# Altium PCB Room04.PcbDoc
Units mil, origin at the board's own origin, x right, y up, seen from the top; angles counter-clockwise.
Board outline 4330.71 x 6653.54 mil, 2 copper layers (Top Layer, Bottom Layer); 102 components, 95 nets, 435 pads, 114 vias.
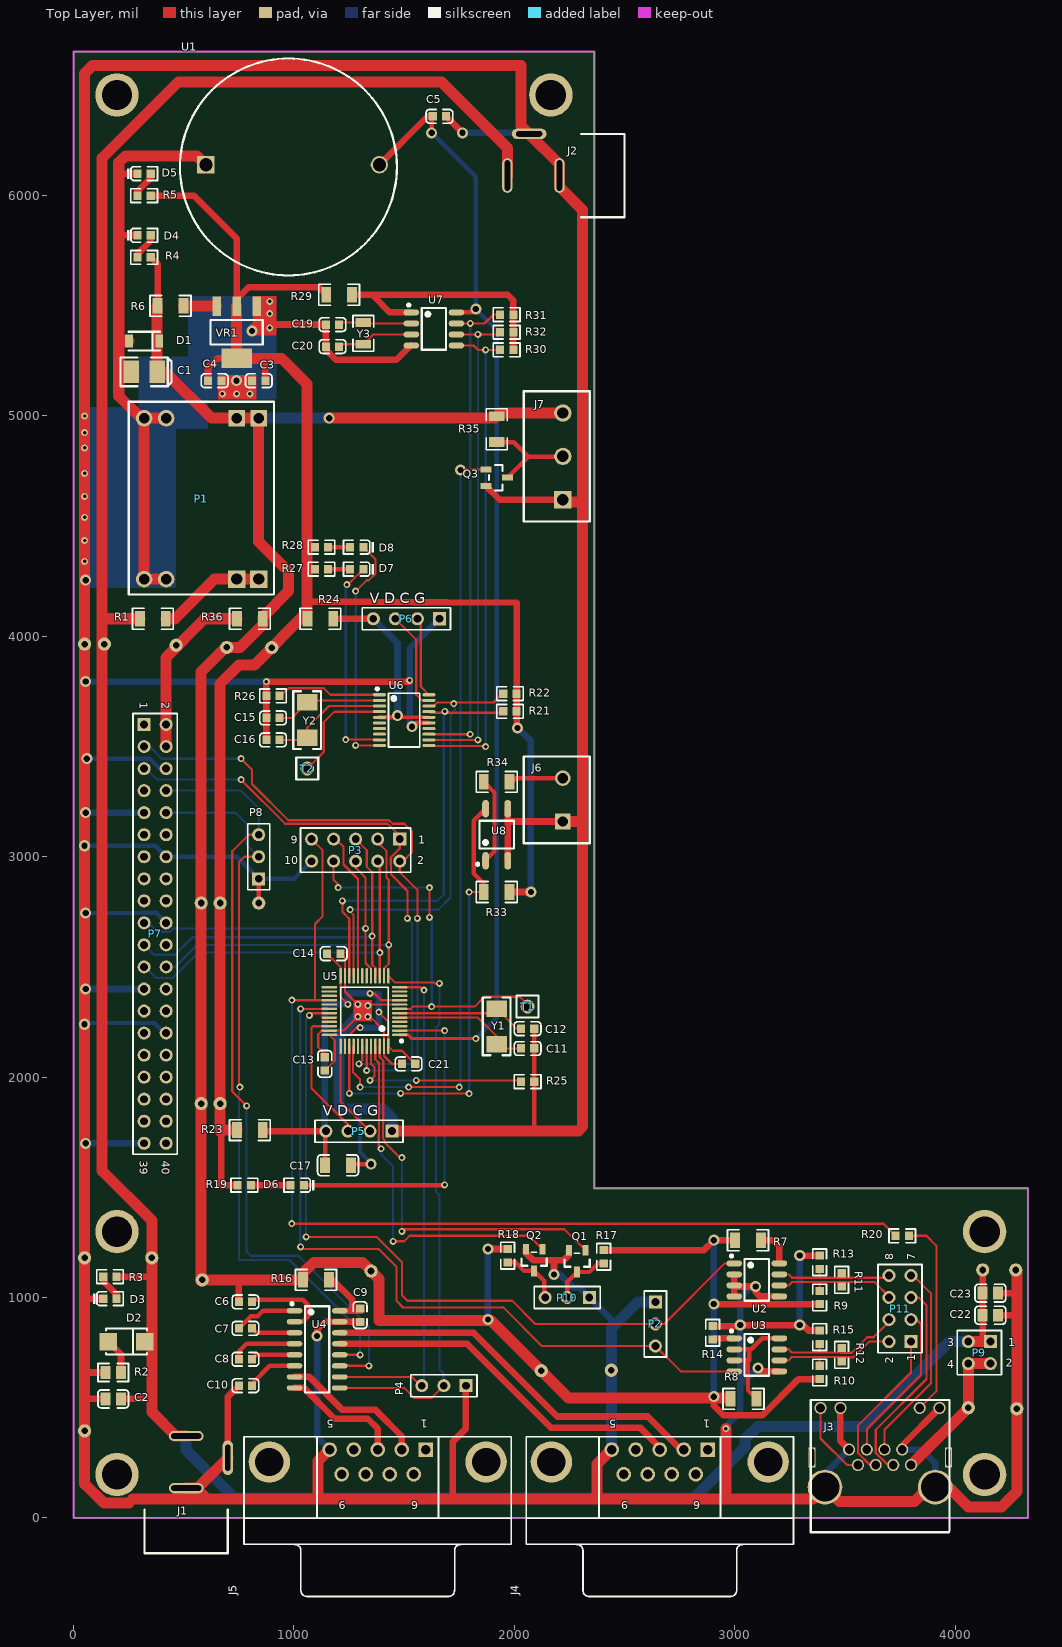
[diagram p0: Top Layer view]
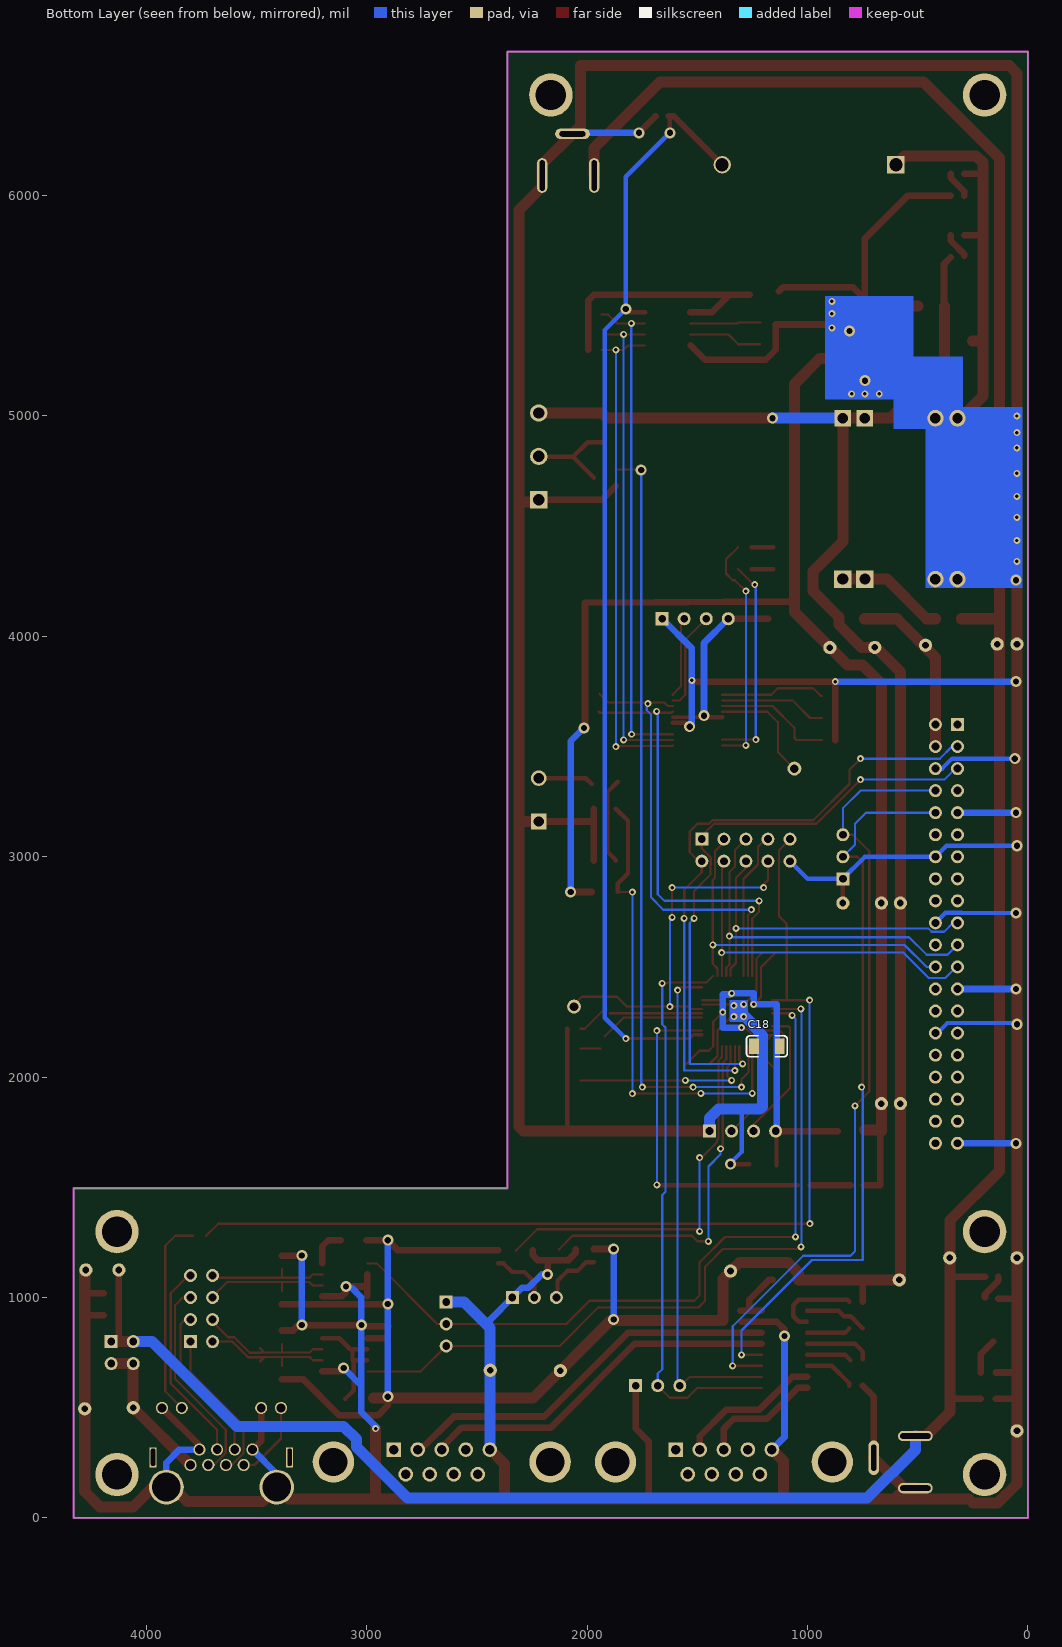
[diagram p1: Bottom Layer view, seen from below]
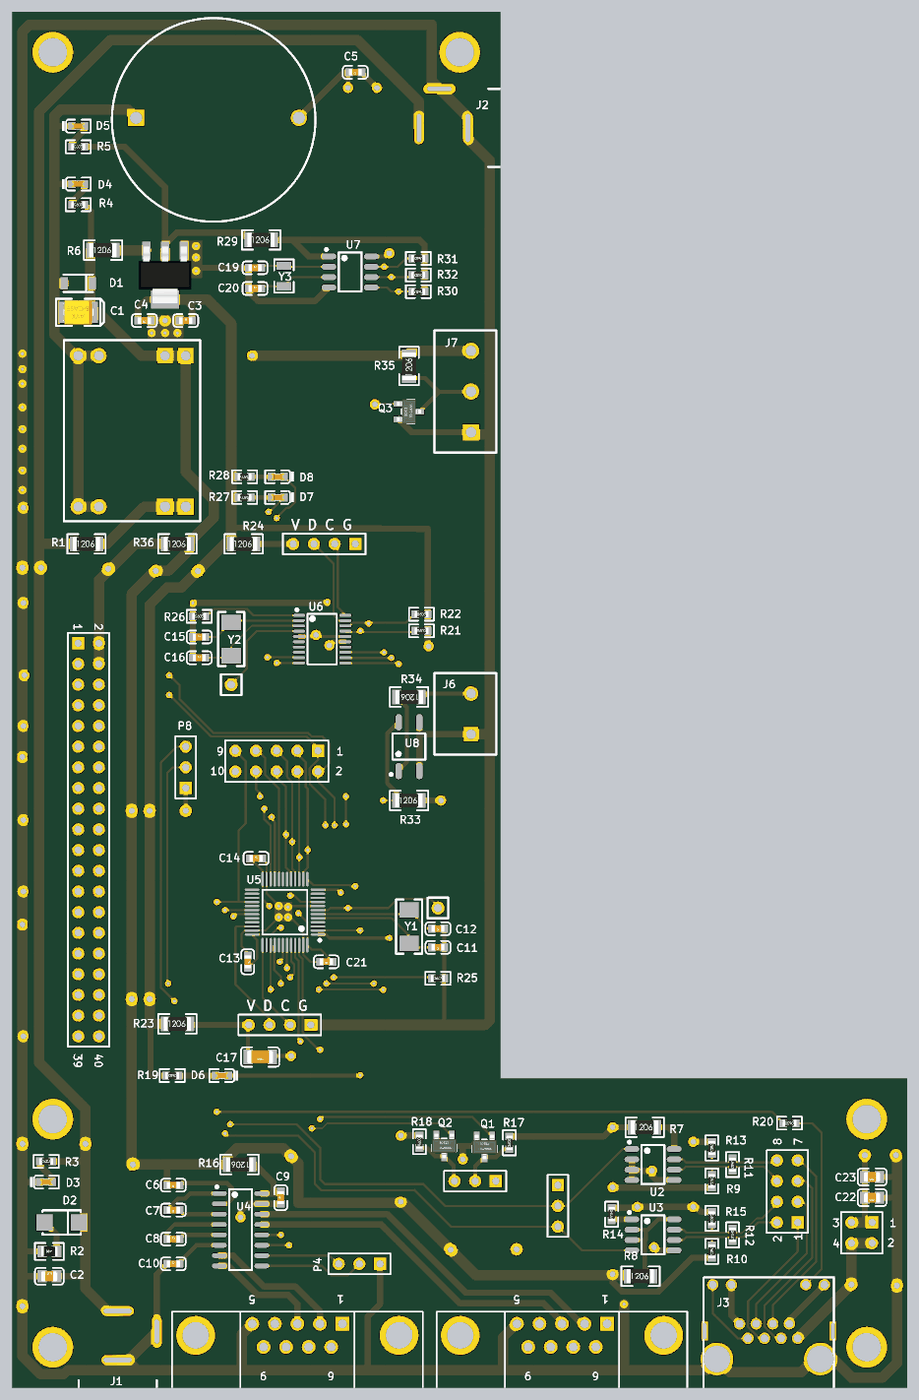
[diagram p2: 3D render of the assembled board from above, using the file's embedded part models]

## Layer stack, top to bottom
Top Layer: signal copper 1.4
Dielectric: dielectric 12.6, FR-4, Dk 4.8
Bottom Layer: signal copper 1.4

## Board outline
0,0 4330.71,0 4330.71,1496.06 2362.2,1496.06 2362.2,6653.54 0,6653.54

## Design rules (kind name [scope] priority, off if disabled: settings)
Clearance [All] p1: gap=6
DiffPairsRouting [All] p1: maxlimit=10 minlimit=10 mostfreqgap=10 maxuncoupledlength=500
Height [All] p1 off: minheight=0 maxheight=1000 prefheight=500
HoleSize [All] p1: absolutevalues=TRUE maxlimit=236.22 minlimit=1 maxpercent=80.000 minpercent=20.000
HoleToHoleClearance [All] p1: gap=6 allowstackedmicrovias=TRUE
MinimumSolderMaskSliver [All] p1: minsoldermaskwidth=4
PolygonConnect [All] p1: connectstyle=Relief reliefconductorwidth=10 reliefentries=4 polygonreliefangle="90 Angle"
RoutingVias [All] p1: holewidth=28 width=50 viastyle="Through Hole" minholewidth=11.81 minwidth=19.68 maxholewidth=28 maxwidth=50
SilkscreenOverComponentPads [All] p1 off: minsilkscreentomaskgap=10
SolderMaskExpansion [All] p1: expansion=4
Width Width_GND [InNet('GND')] p1: maxlimit=50 minlimit=10 preferedwidth=50
Width [All] p2: maxlimit=50 minlimit=10 preferedwidth=10
22 further rules are at their usual default settings.

## Classes and differential pairs
component class power: C1 C2 C3 C4 C5 C22 C23 D1 D2 D3 D4 D5 J1 J2 P1 R1 R2 R3 R4 R5 R6 U1 VR1
component class commu: C6 C7 C8 C9 C10 J3 J4 J5 P2 P9 P10 P11 Q1 Q2 R7 R8 R9 R10 R11 R12 R13 R14 R15 R16 R17 R18 U2 U3 U4
component class mcu: C11 C12 C13 C14 C15 C16 C17 C18 C21 D6 D7 D8 P3 P4 P5 P6 R19 R20 R21 R22 R23 R24 R25 R26 R27 R28 T1 T2 U5 U6 Y1 Y2
component class other: C19 C20 J6 J7 Q3 R29 R30 R31 R32 R33 R34 R35 U7 U8 Y3
component class raspi: P7 P8 R36
differential pair CON1: +CON1_P -CON1_N
differential pair CON2: +CON2_P -CON2_N

## Components (designator, comment, footprint, x,y, rotation, side; value= is the part's Value field where it differs from the comment)
C1 "100uF (107) ±10% 6.3V" CASE-B_3528 320,5200 r0 top
C2 "22uF (226) 20% 25V" 0805_C 180,540 r0 top
C3 "10uF (106) 10% 10V" 0603_C 840,5160 r0 top
C4 "100nF (104) 10% 50V" 0603_C 640,5160 r180 top
C5 "10uF (106) 10% 10V" 0603_C 1660,6360 r180 top
C6 "1uF (105) 10% 50V" 0603_C 780,980 r180 top
C7 "1uF (105) 10% 50V" 0603_C 780,860 r180 top
C8 "1uF (105) 10% 50V" 0603_C 780,720 r0 top
C9 "1uF (105) 10% 50V" 0603_C 1300,920 r90 top
C10 "1uF (105) 10% 50V" 0603_C 780,600 r0 top
C11 "20pF (200) 5% 50V" 0603_C 2060,2130 r180 top
C12 "20pF (200) 5% 50V" 0603_C 2060,2220 r180 top
C13 "100nF (104) 10% 50V" 0603_C 1140,2060 r270 top
C14 "10uF (106) 10% 10V" 0603_C 1180,2560 r0 top
C15 "20pF (200) 5% 50V" 0603_C 905,3630 r0 top
C16 "20pF (200) 5% 50V" 0603_C 905,3530 r0 top
C17 "100nF (104) 10% 50V" 1206_C 1200,1600 r180 top
C18 "100nF (104) 10% 50V" 1206_C 1185,2140 r180 bottom
C19 "12pF (120) 5% 50V" 0603_C 1175,5415 r0 top
C20 "12pF (120) 5% 50V" 0603_C 1175,5315 r0 top
C21 "10uF (106) 10% 10V" 0603_C 1520,2060 r180 top
C22 "22uF (226) 20% 25V" 0805_C 4160,920 r180 top
C23 "100nF(104) 10% 50V" 0805_C 4160,1020 r180 top
D1 "ZMM5V6" LL-34 320,5340 r180 top
D2 "SS54" SMA(DO-214AC)_S1 240,800 r180 top
D3 "绿灯 0603" 0603_LED_S1 165,995 r0 top
D4 "绿灯 0603" 0603_LED_S1 320,5820 r0 top
D5 "绿灯 0603" 0603_LED_S1 320,6100 r0 top
D6 "蓝灯 0603" 0603_LED_S1 1015,1510 r180 top
D7 "蓝灯 0603" 0603_LED_S1 1285,4305 r180 top
D8 "红灯 0603" 0603_LED_S1 1285,4405 r180 top
J1 "DC" DC005 700,-160 r90 top
J2 "DC" DC005 2500,6280 r180 top
J3 "RJ45" RJ45_1 3800,240 r0 top locked
J4 "D Connector 9" DSUB1.385-2H9 2660,-120 r180 top
J5 "D Connector 9" DSUB1.385-2H9 1380,-120 r180 top
J6 "KF301-2P" KF301-2P 2220,3160 r90 top
J7 "KF301-3P" KF301-3P 2220,4620 r90 top
P1 "DC-DC5V3A" DC-DC3A 320,4260 r90 top locked
P2 "Header 3" HDR1X3 2640,980 r270 top
P3 "Header 5X2" HDR2X5 1480,3080 r180 top locked
P4 "Header 3" HDR1X3 1780,600 r180 top
P5 "Header 4" HDR1X4 1445,1755 r180 top
P6 "Header 4" HDR1X4 1660,4080 r180 top
P7 "Header 20X2" HDR2X20 320,3600 r270 top
P8 "Header 3" HDR1X3 840,2900 r90 top
P9 "Header 2X2" HDR2X2 4160,800 r180 top locked
P10 "Header 3" HDR1X3 2340,1000 r180 top
P11 "Header 4X2" HDR2X4 3800,800 r90 top locked
Q1 "2N7002 7002" SOT-23(SOT-23-3) 2285,1165 r90 top
Q2 "2N7002 7002" SOT-23(SOT-23-3) 2090,1170 r90 top
Q3 "2N7002 7002" SOT-23(SOT-23-3) 1920,4720 r180 top
R1 "0.1Ω (R100) ±1%" 1206_R 360,4080 r0 top
R2 "100Ω (1000) ±1%" 0805_R 180,660 r0 top
R3 "20KΩ (2002) ±1%" 0603_R 165,1095 r0 top
R4 "10KΩ (1002) ±1%" 0603_R 320,5720 r0 top
R5 "10KΩ (1002) ±1%" 0603_R 320,6000 r0 top
R6 "0.1Ω (R100) ±1%" 1206_R 440,5500 r0 top
R7 "0Ω (0R0) ±1%" 1206_R 3060,1260 r0 top
R8 "0Ω (0R0) ±1%" 1206_R 3040,540 r0 top
R9 "10KΩ (1002) ±1%" 0603_R 3385,1000 r270 top
R10 "10KΩ (1002) ±1%" 0603_R 3385,660 r270 top
R11 "120Ω (1200) ±1%" 0603_R 3485,1080 r270 top
R12 "120Ω (1200) ±1%" 0603_R 3485,740 r270 top
R13 "10KΩ (1002) ±1%" 0603_R 3385,1160 r270 top
R14 "10KΩ (1002) ±1%" 0603_R 2900,840 r270 top
R15 "10KΩ (1002) ±1%" 0603_R 3385,820 r270 top
R16 "0Ω (0R0) ±1%" 1206_R 1100,1080 r180 top
R17 "10KΩ (1002) ±1%" 0603_R 2405,1185 r90 top
R18 "10KΩ (1002) ±1%" 0603_R 1970,1190 r90 top
R19 "10KΩ (1002) ±1%" 0603_R 775,1510 r180 top
R20 "10KΩ (1002) ±1%" 0603_R 3760,1280 r180 top
R21 "100KΩ (1003) ±1%" 0603_R 1980,3660 r0 top
R22 "100KΩ (1003) ±1%" 0603_R 1980,3740 r0 top
R23 "0Ω (0R0) ±1%" 1206_R 800,1760 r0 top
R24 "0Ω (0R0) ±1%" 1206_R 1120,4080 r0 top
R25 "100KΩ (1003) ±1%" 0603_R 2060,1980 r0 top
R26 "100KΩ (1003) ±1%" 0603_R 905,3730 r0 top
R27 "10KΩ (1002) ±1%" 0603_R 1125,4305 r180 top
R28 "10KΩ (1002) ±1%" 0603_R 1125,4405 r180 top
R29 "0Ω (0R0) ±1%" 1206_R 1205,5550 r0 top
R30 "10KΩ (1002) ±1%" 0603_R 1965,5300 r180 top
R31 "10KΩ (1002) ±1%" 0603_R 1965,5460 r180 top
R32 "10KΩ (1002) ±1%" 0603_R 1965,5380 r180 top
R33 "10KΩ (1002) ±1%" 1206_R 1920,2840 r0 top
R34 "1KΩ (1001) ±1%" 1206_R 1920,3340 r180 top
R35 "10KΩ (1002) ±1%" 1206_R 1920,4940 r90 top
R36 "0Ω (0R0) ±1%" 1206_R 800,4080 r0 top
T1 "TP1" TP1 2060,2320 r0 top
T2 "TP1" TP1 1060,3400 r0 top
U1 "BAT" BAT2032 600,6140 r0 top
U2 "SN75176BDR" SOIC-8_150mil 3100,1080 r270 top
U3 "SN75176BDR" SOIC-8_150mil 3100,740 r270 top
U4 "MAX232ESE" SOIC-16_150mil 1105,765 r270 top locked
U5 "STM32F103C8T6" LQFP-48_7x7x05P 1320,2300 r90 top locked
U6 "STM32F030F4P6" TSSOP-20 1500,3620 r270 top locked
U7 "DS1302Z+T&R" SOIC-8_150mil 1635,5395 r270 top
U8 "EL357N(B)(TA)-G" SOP-4_P2.54 1920,3100 r90 top
VR1 "AMS1117-3.3" SOT-223 740,5380 r90 top
Y1 "8MHz ±20ppm 20pF" SMD-5032_2P 1920,2230 r90 top
Y2 "8MHz ±20ppm 20pF" SMD-5032_2P 1060,3620 r270 top
Y3 "32.768KHz ±20ppm 12.5pF" "SMD-3215_2P FC - 135" 1315,5375 r270 top

## Footprints (in the part's own frame and the unit in brackets; to place one, negate y for a bottom-side part, rotate by r counter-clockwise, add the part's x,y. Pads: shape width x height; smd on the part's side, far side on the other; paste and mask are expansions set on the pad)
0603_C [mm]
  rect 0.93x0.98 smd: 1(-0.77,0) 2(0.77,0)
  silkscreen extent -1.53,-0.79 1.54,0.79, body extent -0.8,-0.4 0.8,0.4, height 0.3
0603_LED_S1 [mm]
  rect 0.93x0.98 smd: A(0.77,0) K(-0.77,0)
  silkscreen extent -1.97,-0.79 1.54,0.79, body extent -0.8,-0.4 0.8,0.4, height 0.6
0603_R [mm]
  rect 0.93x0.98 smd: 1(-0.77,0) 2(0.77,0)
  silkscreen extent -1.53,-0.79 1.54,0.79, body extent -0.85,-0.4 0.85,0.4, height 0.56
0805_C [mm]
  rect 1.16x1.47 smd: 1(-0.89,0) 2(0.89,0)
  silkscreen extent -1.77,-1.04 1.77,1.04, body extent -1,-0.63 1,0.63, height 0.77
0805_R [mm]
  rect 1.16x1.47 smd: 1(-0.89,0) 2(0.89,0)
  silkscreen extent -1.77,-1.04 1.77,1.03, body extent -1,-0.62 1,0.63, height 0.49
1206_C [mm]
  rect 1.13x1.8 smd: 1(-1.49,0) 2(1.49,0)
  silkscreen extent -2.36,-1.2 2.35,1.2, body extent -1.6,-0.81 1.6,0.79, height 1
1206_R [mm]
  rect 1.13x1.8 smd: 1(-1.49,0) 2(1.49,0)
  silkscreen extent -2.36,-1.2 2.35,1.2, body extent -1.7,-0.86 1.65,0.87, height 0.85
BAT2032 [mm]
  rect 2x2 hole 1.5: 1(0,0)
  round 2 hole 1.5: 2(20,0)
  silkscreen extent -2.97,-12.75 22.02,12.24
CASE-B_3528 [mm]
  rect 1.8x2.6 smd: 1(1.5,0) 2(-1.5,0)
  silkscreen extent -2.73,-1.65 3.16,1.65, body extent -1.85,-1.47 1.85,1.46, height 2.03
DC005 [mm]
  oval 1.2x4 hole 0.6 slot 3.5 at 90 deg: 1(13.5,4.8) 3(7.5,4.8)
  oval 4x1.2 hole 0.6 slot 3 at 0 deg: 2(11,0)
  silkscreen extent 0,0 5,9.6
DC-DC3A [mm] "DC-DC5V3Amodule"
  round 1.9 hole 1.2: 1(0,0) 2(0,-2.54) 7(18.542,-2.54) 8(18.542,0)
  rect 2x2 hole 1.3: 3(0,-10.668) 4(0,-13.208)
  rect 1.9x1.9 hole 1.2: 5(18.542,-13.208) 6(18.542,-10.668)
  silkscreen extent -1.78,-14.99 20.45,1.78
DSUB1.385-2H9 [mm] "Connector; D Subminiature; 9 Position; Right Angle; Pitch 1.385 mm"
  rect 1.69x1.69 hole 1.09: 1(-5.54,-10.92)
  round 1.69 hole 1.09: 2(-2.77,-10.92) 3(0,-10.92) 4(2.77,-10.92) 5(5.54,-10.92) 6(-4.155,-8.08) 7(-1.385,-8.08) 8(1.385,-8.08) 9(4.155,-8.08)
  round 4.76 hole 3.26: 10(-12.495,-9.5) 11(12.495,-9.5)
  silkscreen extent -15.4,-12.4 15.4,6
HDR1X3 [mm] "Connector; Header; 3 Position"
  rect 1.5x1.5 hole 0.9: 1(0,0)
  round 1.5 hole 0.9: 2(2.54,0) 3(5.08,0)
  silkscreen extent -1.27,-1.27 6.35,1.27
HDR1X4 [mm] "Connector; Header; 4 Position"
  rect 1.5x1.5 hole 0.9: 1(0,0)
  round 1.5 hole 0.9: 2(2.54,0) 3(5.08,0) 4(7.62,0)
  silkscreen extent -1.27,-1.27 8.89,1.27
HDR2X2 [mm] "Connector; Header; 2x2 Position"
  rect 1.5x1.5 hole 0.9: 1(0,0)
  round 1.5 hole 0.9: 2(0,2.54) 3(2.54,0) 4(2.54,2.54)
  silkscreen extent -1.27,-1.27 3.81,3.81
HDR2X4 [mm] "Connector; Header; 4x2 Position"
  rect 1.5x1.5 hole 0.9: 1(0,0)
  round 1.5 hole 0.9: 2(0,2.54) 3(2.54,0) 4(2.54,2.54) 5(5.08,0) 6(5.08,2.54) 7(7.62,0) 8(7.62,2.54)
  silkscreen extent -1.27,-1.27 8.89,3.81
HDR2X5 [mm] "Connector; Header; 5x2 Position"
  rect 1.5x1.5 hole 0.9: 1(0,0)
  round 1.5 hole 0.9: 2(0,2.54) 3(2.54,0) 4(2.54,2.54) 5(5.08,0) 6(5.08,2.54) 7(7.62,0) 8(7.62,2.54) 9(10.16,0) 10(10.16,2.54)
  silkscreen extent -1.27,-1.27 11.43,3.81
HDR2X20 [mm] "Connector; Header; 20x2 Position"
  rect 1.5x1.5 hole 0.9: 1(0,0)
  round 1.5 hole 0.9: 2(0,2.54) 3(2.54,0) 4(2.54,2.54) 5(5.08,0) 6(5.08,2.54) 7(7.62,0) 8(7.62,2.54) 9(10.16,0) 10(10.16,2.54) 11(12.7,0) 12(12.7,2.54) 13(15.24,0) 14(15.24,2.54) 15(17.78,0) 16(17.78,2.54) 17(20.32,0) 18(20.32,2.54) 19(22.86,0) 20(22.86,2.54) 21(25.4,0) 22(25.4,2.54) 23(27.94,0) 24(27.94,2.54) 25(30.48,0) 26(30.48,2.54) 27(33.02,0) 28(33.02,2.54) 29(35.56,0) 30(35.56,2.54) 31(38.1,0) 32(38.1,2.54) 33(40.64,0) 34(40.64,2.54) 35(43.18,0) 36(43.18,2.54) 37(45.72,0) 38(45.72,2.54) 39(48.26,0) 40(48.26,2.54)
  silkscreen extent -1.27,-1.27 49.53,3.81
KF301-2P [mm]
  rect 1.8x1.8 hole 1.2: 1(0,0)
  round 1.8 hole 1.2: 2(5,0)
  silkscreen extent -2.5,-3.1 7.5,4.5
KF301-3P [mm]
  rect 2x2 hole 1.3: 1(0,0)
  round 2 hole 1.3: 2(5,0) 3(10,0)
  silkscreen extent -2.5,-3.1 12.5,4.5
LL-34 [mm]
  rect 0.9x1.5 smd: 1(1.75,0) 2(-1.75,0)
  silkscreen extent -1.8,-1.08 1.8,1.08
LQFP-48_7x7x05P [mm]
  oval 0.28x1.8 smd mask+0.051: 1(-2.75,-4.05) 2(-2.25,-4.05) 3(-1.75,-4.05) 4(-1.25,-4.05) 5(-0.75,-4.05) 6(-0.25,-4.05) 7(0.25,-4.05) 8(0.75,-4.05) 9(1.25,-4.05) 10(1.75,-4.05) 11(2.25,-4.05) 12(2.75,-4.05) 25(2.75,4.05) 26(2.25,4.05) 27(1.75,4.05) 28(1.25,4.05) 29(0.75,4.05) 30(0.25,4.05) 31(-0.25,4.05) 32(-0.75,4.05) 33(-1.25,4.05) 34(-1.75,4.05) 35(-2.25,4.05) 36(-2.75,4.05)
  oval 1.8x0.28 smd mask+0.051: 13(4.05,-2.75) 14(4.05,-2.25) 15(4.05,-1.75) 16(4.05,-1.25) 17(4.05,-0.75) 18(4.05,-0.25) 19(4.05,0.25) 20(4.05,0.75) 21(4.05,1.25) 22(4.05,1.75) 23(4.05,2.25) 24(4.05,2.75) 37(-4.05,2.75) 38(-4.05,2.25) 39(-4.05,1.75) 40(-4.05,1.25) 41(-4.05,0.75) 42(-4.05,0.25) 43(-4.05,-0.25) 44(-4.05,-0.75) 45(-4.05,-1.25) 46(-4.05,-1.75) 47(-4.05,-2.25) 48(-4.05,-2.75)
  silkscreen extent -3.6,-4.43 2.75,2.75
RJ45_1 [mm]
  rect 0.8x2.3 hole 0.5 slot 2 at 90 deg: 0(-11.43,0.889) 0(4.318,0.889)
  round 1.4 hole 1: 1(0,0) 2(-1.02,1.78) 3(-2.04,0) 4(-3.06,1.78) 5(-4.08,0) 6(-5.1,1.78) 7(-6.12,0) 8(-7.14,1.78) 9(3.29,6.58) 10(1,6.58) 11(-8.14,6.58) 12(-10.43,6.58)
  round 4 hole 3.3: 13(2.78,-2.54) 14(-9.92,-2.54)
  silkscreen extent -11.56,-7.75 4.44,7.49
SMA(DO-214AC)_S1 [mm]
  rect 2x2 smd: 1(2.1,0) 2(-2.1,0)
  silkscreen extent -2.35,-1.5 2.35,1.5
"SMD-3215_2P FC - 135" [mm]
  rect 1x1.8 smd: 1(-1.25,0) 2(1.25,0)
  silkscreen extent -2.05,-1.2 2.05,1.2
SMD-5032_2P [mm]
  rect 1.9x2.4 smd: 1(-2.05,0) 2(2.05,0)
  silkscreen extent -3.32,-1.6 3.32,1.6
SOIC-8_150mil [mm]
  oval 0.7x1.8 smd: 1(-1.905,-2.6) 2(-0.635,-2.6) 3(0.635,-2.6) 4(1.905,-2.6) 5(1.905,2.6) 6(0.635,2.6) 7(-0.635,2.6) 8(-1.905,2.6)
  silkscreen extent -2.9,-3.05 2.4,1.4
SOIC-16_150mil [mm]
  oval 0.6x1.8 smd: 1(-4.445,-2.6) 2(-3.175,-2.6) 3(-1.905,-2.6) 4(-0.635,-2.6) 5(0.635,-2.6) 6(1.905,-2.6) 7(3.175,-2.6) 8(4.445,-2.6) 9(4.445,2.6) 10(3.175,2.6) 11(1.905,2.6) 12(0.635,2.6) 13(-0.635,2.6) 14(-1.905,2.6) 15(-3.175,2.6) 16(-4.445,2.6)
  silkscreen extent -5.4,-3.05 4.97,1.4
SOP-4_P2.54 [mm]
  oval 2x0.8 smd: 1(-3,1.27) 2(-3,-1.27) 3(3,-1.27) 4(3,1.27)
  silkscreen extent -3.55,-2 1.6,2.35
SOT-23(SOT-23-3) [mm]
  rect 1.25x0.7 smd: 1(1.25,-0.95) 2(1.25,0.95) 3(-1.25,0)
  silkscreen extent -0.65,-1.46 0.9,1.46, body extent -1.5,-1.5 1.5,1.5, height 1.3
SOT-223 [mm]
  rect 2.2x1 smd: 1(3,-2.3) 2(3,0) 3(3,2.3)
  rect 2.2x3.5 smd: 2(-3,0)
  silkscreen extent -1.4,-3 1.4,3, body extent -3.49,-3.24 3.49,3.24, height 1.64
TP1 [mm] "Test Point 1"
  round 1.6 hole 1: 1(0,0)
  silkscreen extent -1.27,-1.27 1.27,1.27
TSSOP-20 [mm]
  oval 0.35x1.5 smd: 1(-2.925,-2.85) 2(-2.275,-2.85) 3(-1.625,-2.85) 4(-0.975,-2.85) 5(-0.325,-2.85) 6(0.325,-2.85) 7(0.975,-2.85) 8(1.625,-2.85) 9(2.275,-2.85) 10(2.925,-2.85) 11(2.925,2.85) 12(2.275,2.85) 13(1.625,2.85) 14(0.975,2.85) 15(0.325,2.85) 16(-0.325,2.85) 17(-0.975,2.85) 18(-1.625,2.85) 19(-2.275,2.85) 20(-2.925,2.85)
  silkscreen extent -3.75,-3.25 3.1,1.8

## Part data
C1: library part "3528 100uF (107) 10% 6.3V", "钽电容"
C2 C22: library part "0805 22uF (226) 20% 25V", "贴片电容"
C3 C5 C14 C21: library part "0603 10uF (106) 10% 10V", "贴片电容"
C4 C13: library part "0603 100nF (104) 10% 50V", "贴片电容"
C6 C7 C8 C9 C10: library part "0603 1uF (105) 10% 50V", "贴片电容"
C11 C12 C15 C16: library part "0603 20pF (200) 5% 50V", "贴片电容"
C17 C18: library part "1206 100nF (104) 10% 50V", "贴片电容"
C19 C20: library part "0603 12pF (120) 5% 50V", "贴片电容"
C23: library part "0805 100nF(104) 10% 50V", "贴片电容"
D1: library part "LL-34 ZMM5V6", "稳压二极管"
D2: library part "SMA(DO-214AC) SS54", "二极管"
D3 D4 D5: library part "0603 绿灯", "发光二极管"
D6 D7: library part "0603 蓝灯", "发光二极管"
D8: library part "0603 红灯", "发光二极管"
J1 J2: "Connector for DC 12V"
J3: library part RJ45_1
J4 J5: "Receptacle Assembly, 9 Position, Right Angle"
P1: library part DC-DC3A
P2 P4 P8 P10: "Header, 3-Pin"
P3: "Header, 5-Pin, Dual row"
P5 P6: "Header, 4-Pin"
P7: "Header, 20-Pin, Dual row"
P9: "Header, 2-Pin, Dual row"
P11: "Header, 4-Pin, Dual row"
Q1 Q2 Q3: "MOS(场效应管)"
R1 R6: library part "1206 0.1Ω (R100) 1%", "贴片电阻"
R2: library part "0805 100Ω (1000) 1%", "贴片电阻"
R3: library part "0603 20KΩ (2002) 1%", "贴片电阻"
R4 R5 R9 R10 R13 R14 R15 R17 R18 R19 R20 R27 R28 R30 R31 R32: library part "0603 10KΩ (1002) 1%", "贴片电阻"
R7 R8 R16 R23 R24 R29 R36: library part "1206 0Ω (0R0) 1%", "贴片电阻"
R11 R12: library part "0603 120Ω (1200) 1%", "贴片电阻"
R21 R22 R25 R26: library part "0603 100KΩ (1003) 1%", "贴片电阻"
R33 R35: library part "1206 10KΩ (1002) 1%", "贴片电阻"
R34: library part "1206 1KΩ (1001) 1%", "贴片电阻"
U1: library part BAT2032
U2 U3: library part SN75176BDR_[C7063], "RS-485/RS-422"
U4: library part MAX232ESE_[C26860], "RS232"
U5 U6: "ARM"
U7: library part DS1302Z+T&R_[C8959], "实时时钟"
U8: library part EL357N(B)(TA)-G_[C6649], "贴片光耦"
VR1: library part "SOT-223 AMS1117-3.3", "低压差线性稳压(LDO)"
Y1 Y2: library part "SMD-5032_2P 8MHz 20ppm 20pF", "贴片晶振"
Y3: library part "SMD-3215_2P 32.768KHz 20ppm 12.5pF", "贴片晶振"

## Free pads (board coordinates)
  round 196.85 hole 137.8: 0(196.85,196.85) 0(196.85,1299.21) 0(196.85,6456.69) 0(2165.35,6456.69) 0(4133.86,196.85) 0(4133.86,1299.21)
  round 60 hole 30: 0(584,1080) 0(4060,500) 0(4275,1125) 1(355,1180) 1(4280,495) 2(50,1180) 2(4124.96,1125) 3(50,395) 3(2440,670) 4(2121.91,668.09) 5(1349.77,1120.23) 6(665,1880) 7(579,1880) 8(840,2790) 9(665,2790) 10(579,2790) 11(50,3965) 12(140,3965) 13(465,3960) 14(695,3950) 15(899.04,3949.04)

## Via types
v1: diameter 31.5, hole 15.75, Top Layer to Bottom Layer, 81 vias
v2: diameter 50, hole 28, Top Layer to Bottom Layer, 33 vias

## Nets (pads, with @x,y where several pads share a name; then routed paths per layer and width w, separated by ;. In a path a pad name is that pad's centre, name@x,y a point inside that pad or via, vN(x,y) a via of type N, cw(c..) or ccw(c..) an arc to the next point about the centre after c; other vN are vias at no path point)
ADC2_IN0: U5.10
ADC2_IN1: U5.11
BEEP: P3.7 U5.20 | length 672.2
  Top Layer w10: P3.7 1190,3080 1225,3045 1225,2965 1290.47,2899.53 U5.20
BOOT0: R25.1 U5.44 | length 854.9
  Top Layer w10: v1(1345,1985) 1365,2005 1365,2045 1349.53,2060.47 U5.44 ; v1(1555,1985) R25.1@2029.69,1985
  Bottom Layer w10: v1(1345,1985) v1(1555,1985)
C1+: C7.2 U4.1 | length 286.1
  Top Layer w20: C7.2 804.68,915 835,915 860,940 U4.1
C1-: C7.1 U4.3 | length 200.6
  Top Layer w20: C7.1 830.32,840 U4.3
C2+: C8.1 U4.4 | length 302.3
  Top Layer w20: C8.1 749.68,754.68 785,790 U4.4
C2-: C8.2 U4.5 | length 207.7
  Top Layer w20: C8.2@805.32,715 830.32,740 U4.5
CON1_N: P11.8 R11.1 R13.2 U2.7 | length 533.5
  Top Layer w10: U2.7 3245,1105 3260,1090 3385,1090 ; R13.2 3385,1090 ; P11.8@3690,1090 3385,1090
CON1_N_O: J3.4 P11.7 | length 930.2
  Top Layer w10: J3.4 3679.53,399.53 3890,610 3890,1020 3810,1100 P11.7
  Bottom Layer w10: P11.7 P11.7@3810,1100
CON1_P: P11.6 R9.1 R11.2 U2.6 | length 570.5
  Top Layer w10: U2.6 3245,1055 3260,1070 3385,1070 ; R9.1 3385,1070 ; P11.6@3700,1005 3635,1070 3385,1070
CON1_P_O: J3.3 P11.5 | length 976.8
  Top Layer w10: J3.3 3695,240 3640,295 3640,400 3870,630 3870,965 3835,1000 P11.5
  Bottom Layer w10: J3.3@3695.08,240 J3.3
CON2_N: P11.4 R12.1 R15.2 U3.7 | length 641
  Top Layer w10: U3.7 3245,765 3260,750 3385,750 ; R15.2 3385,750 ; R12.1 3464.69,750 ; P11.4 3700,890 3630,820 3601.72,820 3530.86,749.14 3480.86,749.14 3480,750 3464.69,750 ; 3385,750 3464.69,750
CON2_N_O: J3.6 P11.3 | length 750
  Top Layer w10: J3.6 3600,310.87 3600,405 3845,650 3845,880 3825,900 P11.3
  Bottom Layer w10: P11.3 P11.3@3825,900
CON2_P: P11.2 R10.1 R12.2 U3.6 | length 602
  Top Layer w10: U3.6 3245,715 3260,730 3385,730 ; R10.1 3385,730 ; R12.2 3464.68,730 ; P11.2 3610,800 3539.14,729.14 3510,729.14 3472.57,729.14 3471.72,730 3464.69,730 ; 3385,730 3464.68,730
CON2_P_O: J3.5 P11.1 | length 732
  Top Layer w10: J3.5 3613.59,240 3560,293.59 3560,420 3800,660 P11.1
  Bottom Layer w10: J3.5@3614.76,240 J3.5
DS1302_IO: R32.2 U6.12 U7.6 | length 2249.9
  Top Layer w10: U6.12 1613.36,3529.28 v1@1834.28,3529.28 ; U7.6 v1(1835,5370) R32.2@1924.68,5370
  Bottom Layer w10: v1(1835,3530) v1(1835,5370)
DS1302_RSTN: R30.2 U6.11 U7.5 | length 2255.8
  Top Layer w10: U6.11 1613.8,3503.25 v1@1866.75,3503.25 ; U7.5 1815,5320 1835,5300 v1(1870,5300) R30.2
  Bottom Layer w10: v1@1870,3505 v1(1870,5300)
  other v1: 1870,3500
DS1302_SCK: R31.2 U6.13 U7.7 | length 2265.7
  Top Layer w10: U6.13 v1(1798.98,3556.02) ; U7.7 v1(1800,5420) 1865,5420 1905,5460 R31.2
  Bottom Layer w10: v1@1800,3555 v1(1800,5420)
DS1302_X1: C19.2 U7.2 Y3.1 | length 313.9
  Top Layer w10: C19.2@1214.53,5424.21 Y3.1 ; Y3.1@1319.21,5420 U7.2
DS1302_X2: C20.2 U7.3 Y3.2 | length 334.8
  Top Layer w10: C20.2@1216.1,5325.79 Y3.2 1359.21,5370 U7.3
EX_CON1: P10.3 Q2.3 R18.1 | length 277.6
  Top Layer w20: R18.1 2005.31,1159.69 2044.21,1120.79 Q2.3 2135,1075.79 2135,1005 P10.3
EX_CON2: P10.2 Q1.3 R17.1 | length 270.5
  Top Layer w20: P10.2 2240,1070.79 Q1.3 2340.79,1115.79 2379.69,1154.69 R17.1
GND: C1.2 C2.1 C3.1 C4.1 C5.1 C9.1 C10.1 C11.1 C12.1 C13.1 C14.2 C15.1 C16.1 C17.1 C18.1 C19.1 C20.1 C21.2 C22.1 C23.1 D1.1 D3.K D4.K D5.K J1.2 J1.3 J2.2 J2.3 J3.2 J3.8 J3.9 J3.11 J3.13 J3.14 J4.5 J5.5 J6.1 J7.1 P1.1 P1.2 P1.7 P1.8 P2.1 P3.10 P4.1 P5.1 P6.1 P7.6 P7.9 P7.14 P7.20 P7.25 P7.30 P7.39 P8.1 P10.1 pad.0@4275,1125 pad.1@4280,495 pad.2@50,1180 pad.3 pad.8 pad.11 Q1.2 Q2.2 Q3.2 R2.1 R13.1 R14.1 R15.1 R25.2 R26.1 U1.1 U2.2 U2.3 U2.4 U2.5 U3.5 U4.15 U5.8 U5.23 U5.35 U5.47 U6.15 U7.4 U8.2 U8.3 VR1.1 | length 41757.3
  Top Layer w10: C13.1 1140,2105 1110,2135 1110,2195 1126.42,2211.42 U5.35 1226.42,2211.42 v1(1290,2275) v1@1295,2280 ; C14.2 1231.42,2538.9 U5.23 1231.42,2388.58 v1(1290,2330) 1310,2310 ; v1@1334.53,2329.53 U5.8 ; v1@1335,2285 1408.58,2211.42 U5.47 1408.58,2096.42 1445,2060 C21.2
  Top Layer w20: pad.8 P8.1 ; C17.1@1263.66,1605 v2(1350,1605) ; v2(1535,3590) 1552.2,3607.2 U6.15 ; 2090.32,1755.32 R25.2 C11.1 C12.1 ; 2180,1170 2185.53,1164.47
  Top Layer w30: 50,995 D3.K ; 55,540 C2.1 ; 55,660 R2.1 ; 205,5820 D4.K ; 205,6100 D5.K ; J1.2 700,550.32 C10.1 ; C16.1 R26.1 v1(874.69,3795) v1@1525,3795 ; 900,5415 C19.1 C20.1 1144.68,5300.31 1190,5255 1465,5255 U7.4@1530,5320 ; v2(1105,825) 1105,855 1140,890 U4.15 C9.1@1300,890 ; C5.1 1765.32,6285 v2(1765,6285) ; 1720,85 1720,345 1780,405 P4.1 ; Q3.2 1933.39,4620 J7.1 ; U8.2 U8.3 ; 1975,3160 J6.1 ; Q2.2 2052.6,1202.4 2085,1170 2180,1170 ; v2(2180,1105) 2180,1170 ; 2226.39,1168.61 2225,1170 ; Q1.2 2247.6,1192.6 2225,1170 ; R14.1 v2@3020.31,870.31 ; U2.4 U2.3 U2.2 ; U2.3@3002.64,1050 v2(3095,1050) 3095,1025 3115,1005 U2.5 ; v2(3025,875) v2(3295,875) 3310,875 3334.69,850.31 R15.1 ; v2@3120,665 U3.5 ; v2(3295,1190) 3295.31,1190.31 R13.1 ; J3.11 3479.53,349.45 J3.8 ; J3.2 3759.84,329.37 J3.9 ; C22.1 4280,920 ; C23.1 4280,1020 ; 2180,1170 2225,1170
  Top Layer w50: 205,5340 D1.1 ; 250.46,67.43 137.57,67.43 50,155 50,395 50,995 50,1180 v2(50,2240) v2(50,3050) 50,3795 v1(50,4340) v1(50,4435) v1(50,4540) v1(50,4635) v1(50,4740) v1(50,4855) v1(50,4925) v1(50,5000) 50,6555 85,6590 2030,6590 2030,6316.93 J2.2 2204.72,6142.2 J2.3 2204.72,6040.28 2310,5935 2310,4610 ; 268.03,85 605,85 ; P1.2 P1.1 P1.8 ; P1.7 P1.8 ; U1.1 560,6180 235,6180 205,6150 205,6100 205,5820 205,5090 305,4990 P1.8 ; J1.2 562.2,135.28 J1.3 554.72,135.28 605,85 ; v2(810,5385) 830.55,5405.55 ; 1110,90 1110,258.03 J5.5 ; P5.1 2290,1755 2310,1775 2310,3175 ; J6.1 2295,3160 2310,3175 ; J7.1@2230,4610 2310,4610 ; J4.5 2439.92,309.92 2375,245 2375,85 ; 2960,95 v1(2960,405) ; J3.13@3880,140 3815,75 3474.45,75 J3.14 3354.45,85 2375,85 ; J3.13 3970,140 4060,50 4210,50 4280,120 4280,920 4280,1020 pad.0@4280,1115 ; 605,85 1720,85 2375,85 ; 2310,3175 2310,4610
  Bottom Layer w20: v2(50,2240) 55.53,2245.53 365.53,2245.53 411.06,2200 P7.30 ; v2(50,3050) 370,3050 P7.14 740,3000 P8.1 1000,2900 P3.10 ; v2(55,2745) 300.61,2745 301.14,2745.53 374.47,2745.53 P7.20 ; v2(60,3445) 60.53,3445.53 344.47,3445.53 390,3400 P7.6 ; 1300,1855 1299.47,1854.47 1299.47,1660.53 1350,1610 v2(1350,1605) ; v2@1525,3600 v2(1535,3590)
  Bottom Layer w30: v2(55,1700) P7.39 ; v2(55,2400) P7.25 ; v2(55,3200) P7.9 ; v2(55,3795) v1(874.69,3795) ; v2(1105,825) 1105,366.81 J5.5 ; v2@1525,3600 v1(1525,3800) 1525,3945 P6.1 ; v2(1765,6285) J2.2@2061.93,6285 ; v2(2180,1105) 2206.46,1105 2266.46,1045 2295,1045 P10.1 2441.89,898.11 2441.89,861.89 ; v1@2955,410 3025,480 3025,600 ; 3070,1045 3025,1000 v2(3025,875) 3025,600 ; v2(3105,680) 3025,600 ; v2(3295,875) v2(3295,1190) ; J3.14 3409.45,200.63 J3.8 ; J3.2 3850.08,310.08 3909.45,250.71 J3.13
  Bottom Layer w50: v2(55,4255) 315,4255 P1.1 P1.2 ; P1.7@420,4995 585,5160 ; v2(740,5160) 585,5160 ; v2(810,5385) 585,5160 ; v1(1290,2275) 1283.89,2275 1253.25,2244.36 1253.25,2238.25 1204.35,2189.35 1204.35,1865.65 1215,1855 1300,1855 1405,1855 1445,1815 P5.1 ; J4.5 2441.89,861.89 2560,980 P2.1
  other v1: 1335,2275 1335,2325 675,5100 740,5100 800,5100 890,5400 890,5465 890,5520
GR2S4: P7.22
I2C_SCL: P3.1 P7.5 U5.42 | length 2704.5
  Top Layer w10: v1(760,3350) 960,3150 1425,3150 1480,3095 P3.1 1480,3037.31 1439.47,2996.79 1439.47,2962.69 1440,2962.16 1440,2920 1515,2845 v1(1515,2720) ; v1(1295,2060) 1310.16,2075.16 U5.42
  Bottom Layer w10: P7.5 330,3400 380,3350 v1(760,3350) ; v1(1295,2060) 1535,2060 1535,2700 v1(1515,2720)
I2C_SDA: P3.2 P7.3 U5.43 | length 2892.6
  Top Layer w10: v1(760,3445) 810,3395 810,3330 974,3166 1431.63,3166 1447.63,3150 1500,3150 1535,3115 1535,3020 1495,2980 P3.2 1480,2930 1560,2850 v1@1560,2730 ; v1(1329.84,2030.16) U5.43
  Bottom Layer w10: P7.3 345,3500 400,3445 v1(760,3445) ; v1(1329.84,2030.16) 1560,2030.16 v1(1560,2720)
IO1_103: U5.18
IO2_103: U5.19
IO3_103: R33.1 U5.39 U8.4 | length 2159.8
  Top Layer w10: v1(1251.1,1926.1) U5.39 ; v1(1483.9,1926.1) v1@1795,1926.1 ; v1(1795,2840) R33.1
  Top Layer w20: R33.1 1861.34,2878.66 1815,2925 1815,3163.11 U8.4
  Bottom Layer w10: v1(1251.1,1926.1) v1(1483.9,1926.1) ; v1(1795,1925) v1(1795,2840)
IO4: J7.2 Q3.3 R35.1 | length 462.6
  Top Layer w20: R35.1 1997.87,4881.34 2064.21,4815 ; Q3.3 2064.21,4815 ; J7.2 2218.15,4815 2064.21,4815
IO4_103: Q3.1 U5.40 | length 3578.6
  Top Layer w10: U5.40 1268.25,2138.02 1268.25,2021.75 1300,1990 v1(1300,1955) ; v1(1520,1955) v1(1750,1955) ; v2(1755,4755) 1757.4,4757.4 Q3.1
  Bottom Layer w10: v1(1300,1955) v1(1520,1955) ; v1(1750,1955) 1760,1955 1755,1960 v2(1755,4755)
IO5_103: U5.41
LED3_030: D7.K U6.9 | length 970
  Top Layer w10: v1(1235,3531.75) 1386.48,3531.75 U6.9 ; v1(1240,4235) 1240,4230 1260,4250 1260.31,4250 D7.K
  Bottom Layer w10: v1(1235,3531.75) 1235,4225 1240,4230 v1(1240,4235)
LED4_030: D8.K U6.10 | length 1073.4
  Top Layer w10: v1(1280,4205) 1330,4255 1340,4255 1370,4285 1370,4350.31 D8.K ; v1@1280.16,3504.84 U6.10
  Bottom Layer w10: v1(1280,3505) v1(1280,4205)
LED_103: D6.K U5.2 | length 1542.4
  Top Layer w10: U5.2 v1(1683.58,2211.42)
  Top Layer w20: D6.K v1@1683.58,1510
  Bottom Layer w10: v1(1683.58,1511.42) v1(1683.58,2211.42)
LED_FB: J3.7 J3.12 | length 358.1
  Top Layer w10: J3.12 3389.37,360.63 3510,240 J3.7
LED_ST: J3.10 R20.1 | length 910.6
  Top Layer w10: R20.1 3870,1280 3915,1235 3915,574.68 J3.10
LEDST_103: P3.9 R20.2 U5.28 | length 4711.7
  Top Layer w10: v1(990,1335) 3674.68,1335 R20.2 ; v1(990.79,2349.21) 1095,2349.21 ; P3.9 1130,3030 1130,2730 1095,2695 1095,2349.21 ; U5.28 1095,2349.21
  Bottom Layer w10: v1@990.79,1335.79 v1(990.79,2349.21)
NetC6_1: C6.1 U4.2 | length 391.9
  Top Layer w20: C6.1 820.32,990 1040,990 1065,965 1065,915 1040,890 U4.2
NetC9_2: C9.2 R16.1 U4.16 | length 291.3
  Top Layer w30: R16.1 1175,1080 1265,990 1265,940 ; U4.16 1265,940 ; C9.2@1305,940 1265,940
NetC10_2: C10.2 U4.6 | length 235.6
  Top Layer w20: C10.2 810.32,610.32 890,690 U4.6
NetD2_1: D2.1 R2.2 | length 163.9
  Top Layer w30: D2.1 215.04,742.28 R2.2
NetD3_A: D3.A R3.1 | length 118.4
  Top Layer w30: R3.1 134.69,1075.31 195.32,1014.68 D3.A@195.32,1001.67
NetD4_A: D4.A R4.1 | length 118.4
  Top Layer w30: R4.1@289.69,5726.67 289.69,5734.69 350.32,5795.32 D4.A
NetD5_A: D5.A R5.1 | length 125.1
  Top Layer w30: R5.1 289.69,6019.69 350.32,6080.32 D5.A
NetD6_A: D6.A R19.1 | length 179.4
  Top Layer w30: R19.1 D6.A
NetD7_A: D7.A R27.1 | length 99.4
  Top Layer w20: R27.1 D7.A
NetD8_A: D8.A R28.1 | length 99.4
  Top Layer w20: R28.1 D8.A
NetJ6_2: J6.2 R34.1 | length 251.1
  Top Layer w20: R34.1@1980,3330 2006.85,3356.85 J6.2
NetP1_3: P1.3 P1.4 R1.2 | length 495.9
  Top Layer w50: R1.2 460,4080 640,4260 P1.3 P1.4
NetR6_2: R6.2 VR1.3 | length 148.9
  Top Layer w50: R6.2 VR1.3@647.56,5500
NetR7_2: R7.2 U2.8 | length 172.7
  Top Layer w30: R7.2 3175,1260 3202.36,1232.64 U2.8
NetR8_2: R8.2 U3.2 U3.3 U3.8 | length 528.8
  Top Layer w20: U3.3 3065,715 3065,765 3075,765 3125,815 U3.8 ; U3.2 3060,765 ; 3060,715 3060,578.66 R8.2
NetR14_2: R14.2 U3.1 | length 92.3
  Top Layer w30: R14.2@2905.32,815 U3.1
NetR26_2: R26.2 U6.1 | length 479.3
  Top Layer w10: R26.2 940,3730 975,3765 1135.31,3765 1165.16,3735.16 U6.1
NetR34_2: R34.2 U8.1 | length 394.8
  Top Layer w20: R34.2 1910,3291.34 1910,3025 1870,2985 U8.1
NEX_CON1: Q2.1 U5.45 | length 1632.4
  Top Layer w10: U5.45 1369.21,2080.79 1385.53,2064.47 1385.53,1738.21 1385,1737.69 1385,1685 v1(1395,1675) ; v1(1450,1255) 1500,1255 1525,1280 2066.61,1280 Q2.1
  Bottom Layer w10: v1(1395,1675) 1395,1650 1450,1595 v1(1450,1255)
NEX_CON2: Q1.1 U5.46 | length 1735.8
  Top Layer w10: U5.46 1388.9,2091.1 1405,2075 1405,1789.61 1404.47,1789.08 1404.47,1720.92 1410.92,1714.47 1410.92,1704.08 1480,1635 v1(1490,1635) ; v1@1500,1310 2226.61,1310 Q1.1
  Bottom Layer w10: v1(1490,1300) v1@1490,1620
NRST: P3.8 T1.1 U5.7 | length 1715.3
  Top Layer w10: P3.8 1180,2895 1200,2875 v1(1200,2860) ; U5.7 1529.84,2309.84 1540,2320 v1(1625,2320) 1820,2320 1865,2365 2025,2365 2060,2330 T1.1 ; v1(1615,2725) v1(1615,2860)
  Bottom Layer w10: v1(1200,2860) v1(1615,2860) ; v1(1615,2725) 1625,2715 v1(1625,2320)
NRST_030: T2.1 U6.4 | length 513.9
  Top Layer w10: T2.1 1135,3475 1135,3610 1183.39,3658.39 U6.4
OSC32_IN: C11.2 U5.5 Y1.1 | length 566.3
  Top Layer w10: U5.5 1834.53,2270.47 Y1.1@1920,2185 ; Y1.1@1939.29,2130 C11.2
OSC32_OUT: C12.2 U5.6 Y1.2 | length 567.3
  Top Layer w10: U5.6 Y1.2@1899.45,2290.16 ; Y1.2 2010.71,2220 C12.2
OSC_IN: C15.2 U6.2 Y2.1 | length 472.9
  Top Layer w10: C15.2 989.29,3630 Y2.1 ; Y2.1@1068.86,3709.57 U6.2
OSC_OUT: C16.2 U6.3 Y2.2 | length 543
  Top Layer w10: C16.2 1050.71,3530 Y2.2 1060,3585 1158.98,3683.98 U6.3
RASPI_RX: J4.3 U4.13 | length 1647.3
  Top Layer w30: U4.13 1785,790 2165,410 2570,410 J4.3@2660,320
RASPI_TX: J4.2 U4.14 | length 1781.3
  Top Layer w30: U4.14 1815,840 2195,460 2605,460 2755.08,309.92 J4.2
RU0RX: P7.10 P8.2 U4.12 | length 3349
  Top Layer w10: v1@750,1955 750,2975 775,3000 P8.2 ; U4.12 v1(1300,740)
  Bottom Layer w10: P7.10 735,3200 785,3150 785,3055 P8.2 ; v1@750,1955 750,1170 980,1170 1300,850 v1(1300,740)
  other v1: 755,1955
RU0TX: P7.8 P8.3 U4.11 | length 3574.6
  Top Layer w10: v1(785,1870) 720,1935 720,3025 795,3100 P8.3 ; U4.11 v1(1340,690)
  Bottom Layer w10: P7.8 760,3300 840,3220 P8.3 ; v1(785,1870) 785,1210 805,1190 1020,1190 1340,870 v1(1340,690)
SPI1_MISO: P3.5 P7.21 U5.16 | length 1746.4
  Top Layer w10: P3.5 1330,3030 1330,2955 1355,2930 v1(1355,2640) 1355,2510.19 1369.21,2495.98 U5.16
  Bottom Layer w10: P7.21 365,2555 460,2555 540,2635 1350,2635 v1(1355,2640)
SPI1_MOSI: P3.6 P7.19 U5.17 | length 1577.6
  Top Layer w10: P3.6 1280,2950 1325,2905 1325,2517.56 1349.53,2493.04 U5.17
  Bottom Layer w10: P7.19 340,2700 380.53,2659.47 436.79,2659.47 452.31,2675 v1(1325,2675)
SPI1_NSS: P3.3 P7.24 U5.14 | length 1702.3
  Top Layer w10: P3.3 1380,3065 1420.53,3024.47 1420.53,2904.47 1430,2895 v1(1430,2600) 1430,2515 1430.55,2515 1408.58,2493.04 U5.14
  Bottom Layer w10: P7.24 460,2500 560,2600 v1(1430,2600)
SPI1_SCK: P3.4 P7.23 U5.15 | length 1663.5
  Top Layer w10: U5.15 1388.9,2968.9 P3.4@1400,2980
  Bottom Layer w10: P7.23 325,2500 375,2450 450,2450 565,2565 v1(1390,2565)
SPI2_NSS: P7.26
ST407_RX: J5.3 U4.8 | length 549.1
  Top Layer w30: U4.8 1045,590 1185,450 1335,450 1380,405 J5.3
ST407_TX: J5.2 U4.7 | length 658.9
  Top Layer w30: U4.7 1070,640 1220,490 1370,490 1489.06,370.94 J5.2
SWCLK_030: P6.2 U6.20 | length 366.5
  Top Layer w10: P6.2 1575,4065 1575,3772.36 U6.20
SWCLK_103: P5.2 U5.37 | length 440.8
  Top Layer w10: U5.37 1211.73,1888.27 P5.2
SWDIO_030: P6.3 U6.19 | length 452.1
  Top Layer w10: P6.3 1555,3985 1555,3735 1580.43,3709.57 U6.19
SWDIO_103: P5.3 U5.34 | length 621.4
  Top Layer w10: U5.34 1086.1,2231.1 1080,2225 1080,1950 1245,1785 P5.3
U1RX: P2.2 U2.1 U5.31 | length 3400
  Top Layer w10: v1(1055,1275) 1375,1275 1490,1160 1490,1010 1515,985 1990,985 2095,880 P2.2 2680,880 2955,1155 U2.1 ; v1(1070,2280) v1@1070,2280.16 ; v1@1080,2290.16 U5.31
  Bottom Layer w10: v1(1055,1275) 1055,2265 v1(1070,2280)
U1TX: P2.3 U3.4 U5.30 | length 3502.4
  Top Layer w10: v1(1030,1230) 1040,1220 1385,1220 1465,1140 1465,985 1495,955 1944.93,955 1947.47,957.53 2125,780 P2.3 2755,665 U3.4 ; v1(1030.16,2309.84) U5.30
  Bottom Layer w10: v1@1028.25,2306.75 1028.25,1231.75 v1(1030,1230)
U2RX: P4.2 U4.9 U5.13 | length 2605.8
  Top Layer w10: U4.9 1500,590 1545,545 1625,545 P4.2 ; U5.13 1457.72,2430 1635,2430 1640,2425 v1(1660,2425)
  Bottom Layer w10: v1(1660,2425) 1660,2240 1645,2225 1645,1480 1660,1465 1660,675 1680,655 P4.2
U2TX: P4.3 U4.10 U5.12 | length 2300.3
  Top Layer w10: U4.10 1535,640 1575,600 P4.3 ; U5.12 1576.73,2408.27 v1(1590,2395)
  Bottom Layer w10: P4.3@1590,600 v1(1590,2395)
U3RX: R21.1 U5.22 U6.17 | length 1998.1
  Top Layer w10: v1(1220,2800) 1220,2750 1251.1,2718.9 U5.22 ; U6.17 1617.34,3653.25 1942.94,3653.25 R21.1@1948.07,3658.39
  Bottom Layer w10: v1(1220,2800) 1650,2800 1680,2830 1680,3655 v1(1685,3660)
U3TX: R22.1 U5.21 U6.18 | length 2031.2
  Top Layer w10: v1(1255,2760) 1255,2750 1270.79,2734.21 U5.21 ; U6.18 1634.55,3683.98 1650.58,3700 1905,3700 R22.1@1945,3740
  Bottom Layer w10: v1(1255,2760) 1655,2760 1710,2815 1710,3645 1730,3665 1730,3680 1725,3685 v1(1725,3695)
V3.3: C3.2 C4.2 pad.6 pad.9 pad.15 R5.2 R19.2 R21.2 R22.2 R23.1 R24.1 R27.2 R28.2 R29.1 R33.2 VR1.2 | length 8507.6
  Top Layer w30: R5.2 545,6000 740,5805 VR1.2@740,5498.11 ; C4.2 609.68,5219.69 651.89,5261.89 VR1.2@740,5261.89 ; 670,1760 670,1510 R19.2 ; VR1.2@740,5530 795,5585 1111.34,5585 R29.1@1130.34,5566 ; 833.11,5261.89 870.32,5224.69 C3.2 ; 1066.75,4158.25 2010.32,4152.94 R22.2 R21.2 2010.32,3589.68 v2(2015,3585) ; R33.2 v2(2075,2840)
  Top Layer w50: 665,1755 665,3785 750,3870 820,3870 1060,4110 1060,4165 ; 670,1760 R23.1 ; VR1.2@740,5498.11 740,5261.89 833.11,5261.89 943.11,5261.89 1060,5145 1060,4165 ; 1066.75,4158.25 1060,4165
  Bottom Layer w30: v2(2015,3585) 2075,3525 v2(2075,2840)
V5: C1.1 C6.2 D1.2 J7.3 P1.5 P1.6 pad.0@584,1080 pad.4 pad.5 pad.7 pad.10 pad.14 R4.2 R6.1 R7.1 R8.1 R9.2 R10.2 R16.2 R17.2 R18.2 R35.2 R36.2 | length 12322.5
  Top Layer w30: R4.2 381.34,5688.98 R6.1 ; C6.2 749.68,1079.68 ; v2(1880,1220) 1905,1220 1905.32,1220.32 R18.2 ; R17.2 2860.32,1215.32 v2(2905,1260) R7.1 ; v2(2905,550) 2905,545 2905,510 2950,465 3125,465 3289.68,629.68 R10.2 ; v2(2905,970) 2906,969 3384.32,969 R9.2
  Top Layer w50: C1.1 R6.1@379.06,5497.72 ; 415,5200 625,4990 P1.6 P1.5 840,4430 975,4295 975,4205 R36.2@858.66,4088.66 ; pad.0@579,1075 579,3839 690,3950 755,3950 858.66,4053.66 R36.2 ; pad.0@584,1080 R16.2 1041.34,1111.34 1090,1160 1310,1160 1385,1085 1385,895 1895,895 2245,545 2905,545 R8.1@2970,545 ; v2(1160,4990) 1911.34,4990 1935.04,5013.7 J7.3
  Bottom Layer w30: v2(1880,900) v2(1880,1220) ; v2(2905,550) v2(2905,970) v2(2905,1260)
  Bottom Layer w50: P1.5 v2(1160,4990)
V12: C2.2 C22.2 C23.2 D2.2 J1.1 J2.1 P9.1 P9.3 pad.1@355,1180 pad.2@4124.96,1125 pad.12 R1.1 R3.2 | length 13112.4
  Top Layer w30: R3.2 350,1095 ; C2.2 350,540 ; 4124.96,800.04 C22.2 pad.2@4124.96,1125
  Top Layer w50: 135,4080 R1.1 ; J1.1 463.5,371.5 355,480 355,1180 355,1350 130,1575 130,6170 475,6515 1670,6515 1968.5,6216.5 J2.1 ; P9.3 P9.1
  Bottom Layer w50: J1.1 511.02,308.98 730,90 2815,90 3047.5,322.5 3047.5,357.5 3105,415 3590,415 3975,800 P9.3
V12_OUT: J3.1 P9.2 P9.4 pad.0@4060,500 | length 667.7
  Top Layer w50: J3.1 4060,500 P9.4 P9.2
VBAT: C5.2 U1.2 U5.1 U7.8 | length 5121.6
  Top Layer w15: U5.1 1518.27,2191.73 1535,2175 v1(1825,2175)
  Top Layer w20: v2(1625,6285) C5.2@1625,6355.31 ; U7.8 1810,5470 v2(1825,5485)
  Top Layer w30: U1.2 1607.4,6360 C5.2
  Bottom Layer w20: v2(1625,6285) 1825,6085 v2(1825,5485) 1920,5390 1920,2270 v1(1825,2175)
VCC_030: P6.4 R24.2 U6.5 U6.16 | length 891.3
  Top Layer w15: v2@1470,3632.8 U6.16
  Top Layer w20: U6.5 v2@1470,3632.8
  Top Layer w30: R24.2 P6.4
  Bottom Layer w30: P6.4 1470,3970 v2(1470,3640)
VCC_103: C13.2 C14.1 C17.2 C18.2 C21.1 P5.4 R23.2 U5.9 U5.24 U5.36 U5.48 | length 2635.7
  Top Layer w10: C13.2 1185,2074.68 1185,2167.28 U5.36 1251.73,2191.73 1285,2225 v1(1300,2225) ; C14.1 1150,2560 1211.73,2498.27 U5.24 1211.73,2363.27 v1(1245,2330) ; v1(1345,2380) 1365,2380 1395.79,2349.21 U5.9 ; v1(1385,2295) 1428.27,2251.73 U5.48 1448.82,2120 1490.32,2120 C21.1
  Top Layer w20: C17.2 1141.34,1751.34 P5.4
  Top Layer w30: R23.2@863.66,1755 P5.4
  Bottom Layer w30: P5.4 1140,1760 1140,2330 v1(1245,2330) 1245,2380 v1(1345,2380) 1350,2375 1385,2375 v1(1385,2295) 1385,2225 v1(1300,2225)
VCC_1302: R29.2 R30.1 R31.1 R32.1 U7.1 | length 1177.6
  Top Layer w30: R29.2 1355,5550 ; U7.1 1435,5470 1355,5550 ; R30.1 R32.1 R31.1 1995.31,5524.69 1970,5550 1355,5550
VCC_R: P7.2 P7.4 pad.13 R36.1 | length 798.8
  Top Layer w50: P7.4 P7.2 420,3905 595,4080 R36.1
pads on no net: J3.0 J4.1 J4.4 J4.6 J4.7 J4.8 J4.9 J4.10 J4.11 J5.1 J5.4 J5.6 J5.7 J5.8 J5.9 J5.10 J5.11 P7.1 P7.7 P7.11 P7.12 P7.13 P7.15 P7.16 P7.17 P7.18 P7.27 P7.28 P7.29 P7.31 P7.32 P7.33 P7.34 P7.35 P7.36 P7.37 P7.38 P7.40 U5.3 U5.4 U5.25 U5.26 U5.27 U5.29 U5.32 U5.33 U5.38 U6.6 U6.7 U6.8 U6.14

## Keep-outs
Keep-Out Layer:
  the board outline again, w9.84

## Other copper
Top Layer:
  rectangle net GND: 1270,2255 1355,2350
  rectangle net GND: 815,5365 920,5545
  rectangle net GND: 655,5075 830,5185
Bottom Layer:
  rectangle net GND: 1270,2250 1355,2350
  rectangle net GND: 295,4940 610,5270
  rectangle net GND: 520,5075 920,5545
  rectangle net GND: 25,4220 465,5040

## Silkscreen, mask and mechanical layers (free items; w line width, h text height)
Top Overlay:
  text "V D C G" at 1345,4150 h48
  text "V D C G" at 1130,1825 h48

## Text inside footprints (layer, text, board x,y; h text height)
J4: Top Overlay "1" at 2887.95,445.94 h36 r180; Top Overlay "5" at 2461.57,445.94 h36 r180; Top Overlay "9" at 2516.1,75.87 h36 r180; Top Overlay "6" at 2843.27,75.87 h36 r180
J5: Top Overlay "1" at 1607.95,445.94 h36 r180; Top Overlay "5" at 1181.57,445.94 h36 r180; Top Overlay "9" at 1236.1,75.87 h36 r180; Top Overlay "6" at 1563.27,75.87 h36 r180
P3: Top Overlay "2" at 1560,2965 h36; Top Overlay "1" at 1565,3060 h36; Top Overlay "9" at 985,3060 h36; Top Overlay "10" at 955,2965 h36
P7: Top Overlay "39" at 300,1620 h36 r270; Top Overlay "40" at 400,1620 h36 r270; Top Overlay "2" at 400,3700 h36 r270; Top Overlay "1" at 300,3700 h36 r270
P9: Top Overlay "3" at 3965,780 h36; Top Overlay "4" at 3965,680 h36; Top Overlay "2" at 4230,685 h36; Top Overlay "1" at 4240,780 h36
P11: Top Overlay "8" at 3720,1170 h36 r90; Top Overlay "7" at 3820,1170 h36 r90; Top Overlay "1" at 3820,710 h36 r90; Top Overlay "2" at 3720,700 h36 r90